# Altium PCB X-Bus_V1.0.pcbdoc
Units mil, origin at the board's own origin, x right, y up, seen from the top; angles counter-clockwise.
Board outline 1053.46 x 1407.9 mil, 2 copper layers (Top Layer, Bottom Layer); 33 components, 35 nets, 126 pads, 30 vias.
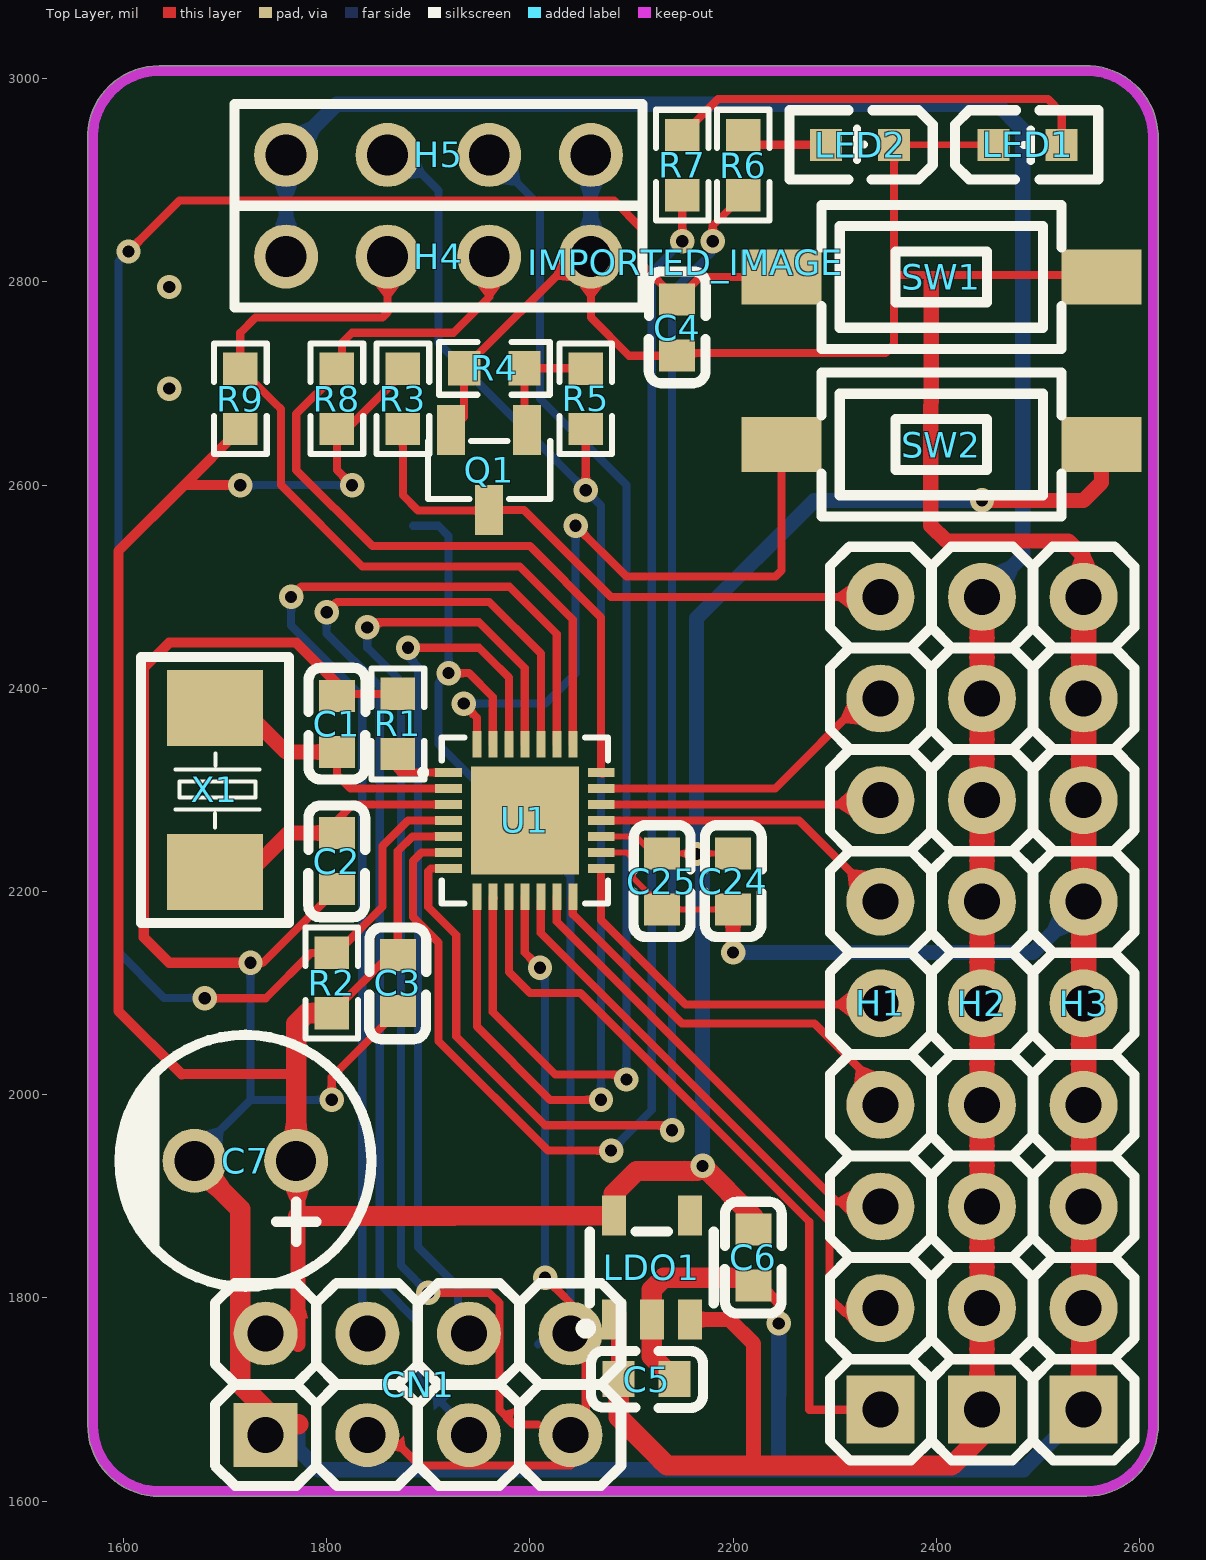
[diagram p0: Top Layer view]
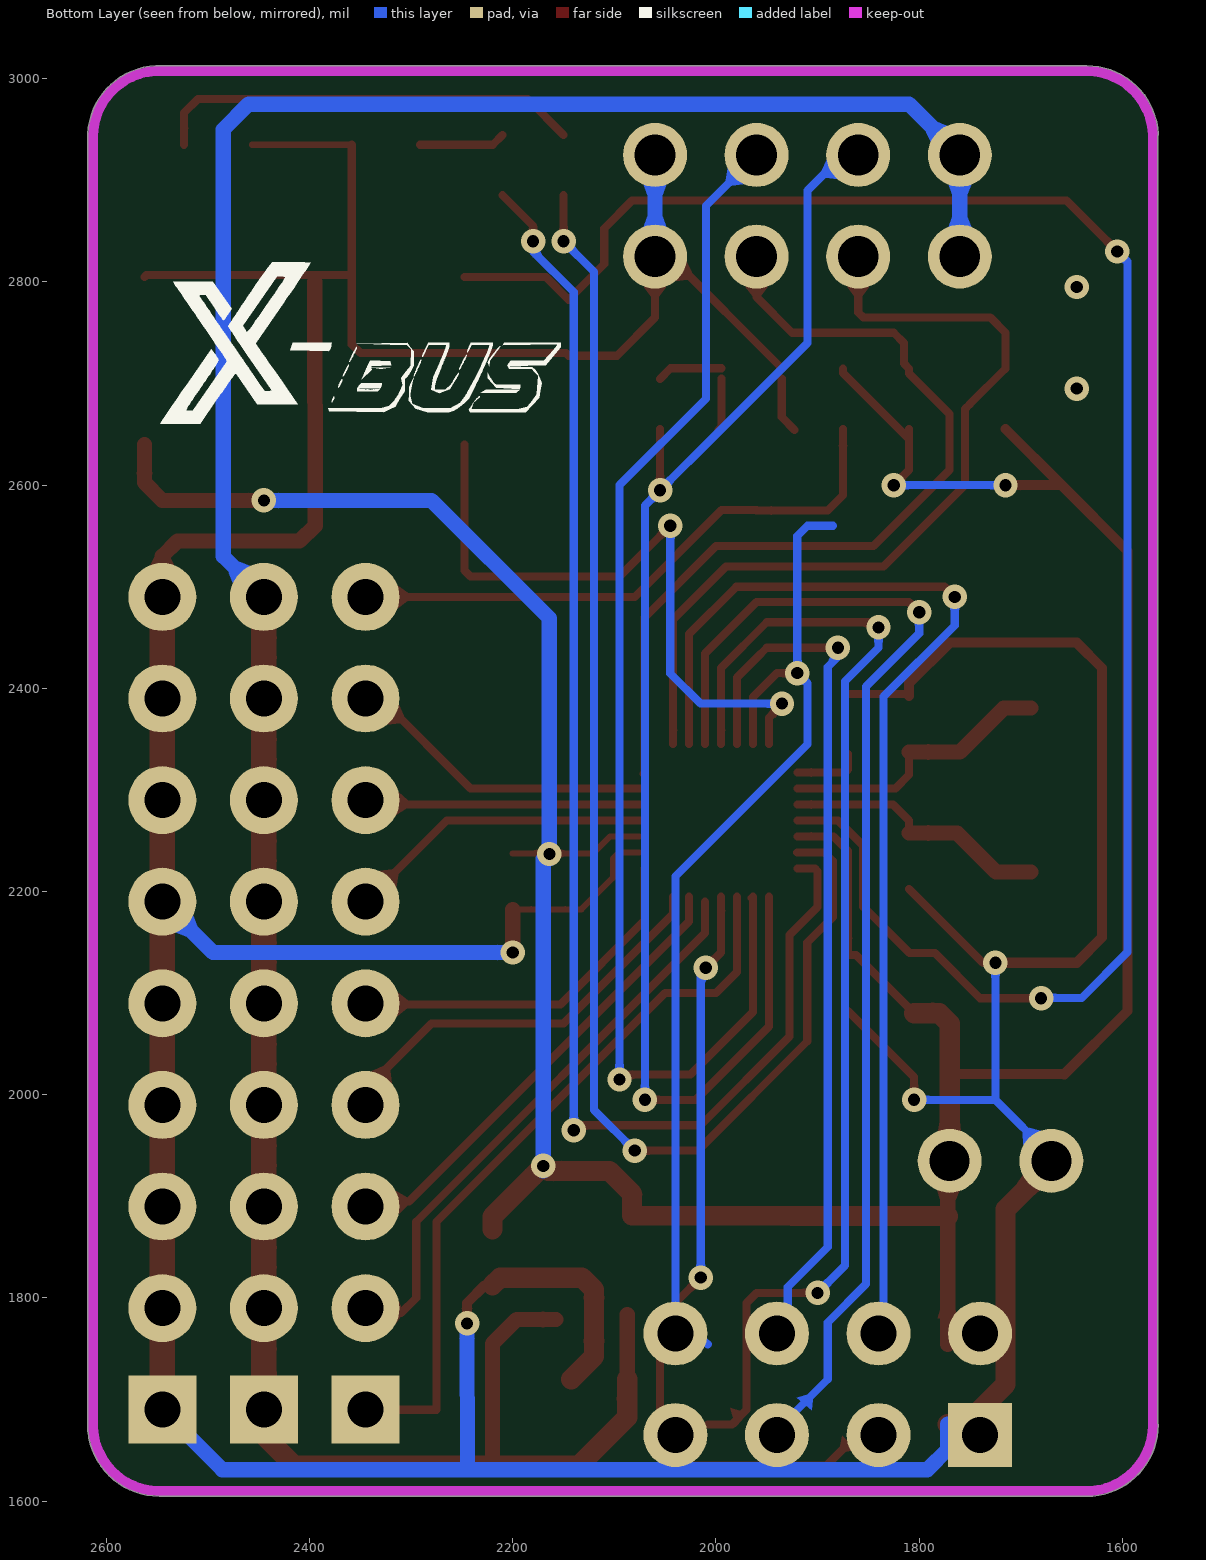
[diagram p1: Bottom Layer view, seen from below]

## Layer stack, top to bottom
Top Solder: solder mask 0.4, Solder Resist, Dk 3.5
Top Layer: signal copper 1.4
Dielectric1: dielectric 12.6, FR-4, Dk 4.8
Bottom Layer: signal copper 1.4
Bottom Solder: solder mask 0.4, Solder Resist, Dk 3.5

## Board outline
1629.95,1604.99 ccw(c1635.06,1674.69) 1631.89,1604.87 ccw(c1632.12,1609.88) 1633.21,1604.98 2547.56,1604.98 ccw(c2548.15,1609.96) 2548.15,1604.95 ccw(c2548.15,1675.16) 2618.02,1668.28 ccw(c2613.31,1670) 2618.32,1670 2618.32,2945 ccw(c2613.31,2945) 2618.24,2945.89 ccw(c2548.11,2942.64) 2551.3,3012.77 ccw(c2551.07,3007.77) 2549.96,3012.65 1635.58,3012.65 ccw(c1635,3007.7) 1635,3012.69 ccw(c1635,2942.48) 1564.87,2945.67 ccw(c1569.88,2945.44) 1564.98,2944.33 1564.98,1676.06 ccw(c1569.89,1675.01) 1564.87,1675.01 ccw(c1635.08,1675) 1629.27,1605.04 ccw(c1630,1610.01)

## Design rules (kind name [scope] priority, off if disabled: settings)
Clearance [All] p1: gap=10 ignorepadtopadclearanceinfootprint=FALSE except(0: Arc-Hole Track-Hole SMDPad-Hole THPad-Hole Via-Hole Fill-Hole Poly-Hole Region-Hole Text-Hole)
PolygonConnect [All] p1: connectstyle=Relief reliefconductorwidth=10 reliefentries=4 polygonreliefangle="90 Angle" airgapwidth=10
RoutingVias [All] p1: holewidth=28 width=50 viastyle="Through Hole" minholewidth=28 minwidth=50 maxholewidth=28 maxwidth=50
SolderMaskExpansion [All] p1: expansion=4 istentingtop=FALSE
Width [All] p1: maxlimit=10 minlimit=10 preferedwidth=10
30 further rules are at their usual default settings.

## Components (designator, comment, footprint, x,y, rotation, side; value= is the part's Value field where it differs from the comment)
C1 "22pF" C0603 1810,2365 r270 top
C2 "22pF" C0603 1810,2230 r90 top
C3 "100nF" C0603 1870,2110 r90 top
C4 "100nF" C0603 2145,2755 r270 top
C5 "1uF" C0603 2115,1720 r180 top
C6 "1uF" C0603 2220,1840 r90 top
C7 "100uF" CAP-TH_BD6.3-P2.50-D1.0-FD 1720,1935 r180 top
C24 "100nF" C0603 2200,2210 r270 top
C25 "4.7uF" C0603 2130,2210 r270 top
CN1 "A2005WV-2X4P" HDR2.54-LI-2x4P 1890,1715 r0 top
H1 "PZ254V-11-09P" HDR2.54-LI-9P 2345,2090 r90 top
H2 "PZ254V-11-09P" HDR2.54-LI-9P 2445,2090 r90 top
H3 "PZ254V-11-09P" HDR2.54-LI-9P 2545,2090 r90 top
H4 "GP26-2520WV-4P" HDR-TH_4P-P2.54-V-F-R1-C4 1910,2825 r180 top
H5 "GP26-2520WV-4P" HDR-TH_4P-P2.54-V-F-R1-C4 1910,2925 r180 top
IMPORTED_IMAGE "Comment" IMPORTED_IMAGE 2153.01,2819.37 r0 top
LDO1 "ME6211C33M5G-N" SOT-23-5_L3.0-W1.7-P0.95-LS2.8-BR 2120,1830 r270 top
LED1 "19-217/GHC-YR1S2/3T" LED0603-R-RD 2490,2935 r0 top
LED2 "19-217/GHC-YR1S2/3T" LED0603-R-RD 2325,2935 r180 top
Q1 "SS8050_C2150" SOT-23-3_L2.9-W1.3-P1.90-LS2.4-BR 1960,2615 r90 top
R1 "10K" R0603 1870,2365 r90 top
R2 "10K" R0603 1805,2110 r270 top
R3 "10K" R0603 1875,2685 r90 top
R4 "10K" R0603 1965,2715 r0 top
R5 "4.7K" R0603 2055,2685 r270 top
R6 "510R" R0603 2210,2915 r270 top
R7 "510R" R0603 2150,2915 r270 top
R8 "10K" R0603 1810,2685 r270 top
R9 "10K" R0603 1715,2685 r90 top
SW1 "TSA363G25-250B" SW-SMD_L6.5-W3.6-LS8.0 2405,2805 r180 top
SW2 "TSA363G25-250B" SW-SMD_L6.5-W3.6-LS8.0 2405,2640 r0 top
U1 "GD32E230G4U6TR" QFN-28_L4.0-W4.0-P0.40-BL-EP 1995,2270 r270 top
X1 "8MHz" OSC-SMD_L5.0-W3.2 1690,2300 r90 top

## Footprints (in the part's own frame and the unit in brackets; to place one, negate y for a bottom-side part, rotate by r counter-clockwise, add the part's x,y. Pads: shape width x height; smd on the part's side, far side on the other; paste and mask are expansions set on the pad)
C0603 [mm]
  rect 0.8x0.9 smd: 1(-0.7,0) 2(0.7,0)
  silkscreen extent -1.41,-0.71 1.39,0.72
CAP-TH_BD6.3-P2.50-D1.0-FD [mm]
  round 1.6 hole 1: 1(-1.27,0) 2(1.27,0)
  silkscreen extent -3.15,-3.15 3.17,3.15
HDR2.54-LI-2x4P [mm] "双排排针，4x2脚"
  rect 1.6x1.6 hole 0.9: 1(-3.81,-1.27)
  round 1.6 hole 0.9: 2(-3.81,1.27) 3(-1.27,-1.27) 4(-1.27,1.27) 5(1.27,-1.27) 6(1.27,1.27) 7(3.81,-1.27) 8(3.81,1.27)
  silkscreen extent -5.08,-2.54 5.08,2.53, body extent -5.08,-2.54 5.08,2.54, height 8.5
HDR2.54-LI-9P [mm] "排针，9脚"
  rect 1.7x1.7 hole 0.9: 1(-10.16,0)
  round 1.7 hole 0.9: 2(-7.62,0) 3(-5.08,0) 4(-2.54,0) 5(0,0) 6(2.54,0) 7(5.08,0) 8(7.62,0) 9(10.16,0)
  silkscreen extent -11.43,-1.27 11.42,1.26, body extent -11.43,-1.27 11.43,1.27, height 2.54
HDR-TH_4P-P2.54-V-F-R1-C4 [mm]
  round 1.6 hole 1.02: 1(-3.81,0) 2(-1.27,0) 3(1.27,0) 4(3.81,0)
  silkscreen extent -5.1,-1.27 5.1,1.27
IMPORTED_IMAGE [mil]
LED0603-R-RD [mm]
  rect 0.8x0.8 smd: 1(0.851,0) 2(-0.851,0)
  silkscreen extent -1.82,-0.86 1.77,0.86
OSC-SMD_L5.0-W3.2 [mm]
  rect 1.9x2.4 smd: 1(-2.05,0) 2(2.05,0)
  silkscreen extent -3.33,-1.85 3.33,1.85
QFN-28_L4.0-W4.0-P0.40-BL-EP [mm]
  rect 0.224x0.665 smd: 1(-1.2,-1.907) 2(-0.8,-1.907) 3(-0.4,-1.907) 4(0,-1.907) 5(0.4,-1.907) 6(0.8,-1.907) 7(1.2,-1.907) 15(1.2,1.907) 16(0.8,1.907) 17(0.4,1.907) 18(0,1.907) 19(-0.4,1.907) 20(-0.8,1.907) 21(-1.2,1.907)
  rect 0.665x0.224 smd: 8(1.907,-1.2) 9(1.907,-0.8) 10(1.907,-0.4) 11(1.907,0) 12(1.907,0.4) 13(1.907,0.8) 14(1.907,1.2) 22(-1.907,1.2) 23(-1.907,0.8) 24(-1.907,0.4) 25(-1.907,0) 26(-1.907,-0.4) 27(-1.907,-0.8) 28(-1.907,-1.2)
  rect 2.7x2.7 smd: 29(0,0)
  silkscreen extent -2.08,-2.61 2.08,2.08
R0603 [mil]
  rect 31.75x34.02 smd: 1(-29.66,0) 2(29.66,0)
  silkscreen extent -55,-26 55,26
SOT-23-3_L2.9-W1.3-P1.90-LS2.4-BR [mm]
  rect 1.25x0.7 smd: 1(1,-0.95) 2(1,0.95) 3(-1,0)
  silkscreen extent -0.73,-1.53 0.73,1.53
SOT-23-5_L3.0-W1.7-P0.95-LS2.8-BR [mm]
  rect 1x0.6 smd: 1(1.3,-0.95) 2(1.3,0) 3(1.3,0.95) 4(-1.3,0.95) 5(-1.3,-0.95)
  silkscreen extent -0.9,-1.78 1.65,1.55
SW-SMD_L6.5-W3.6-LS8.0 [mm]
  rect 2x1.38 smd: 1(-4,0) 2(4,0)
  silkscreen extent -3,-1.8 3,1.8

## Via types
v1: diameter 24, hole 12, Top Layer to Bottom Layer, 30 vias

## Nets (pads, with @x,y where several pads share a name; then routed paths per layer and width w, separated by ;. In a path a pad name is that pad's centre, name@x,y a point inside that pad or via, vN(x,y) a via of type N, cw(c..) or ccw(c..) an arc to the next point about the centre after c; other vN are vias at no path point)
+5V: C5.2 H2.1 H2.2 H2.3 H2.4 H2.5 H2.6 H2.7 H2.8 H2.9 H4.4 H5.4 LDO1.1 LDO1.3 | length 3390.7
  Top Layer w15: LDO1.1@2087.4,1783.82 C5.2 2087.4,1682.52 2135,1635.02 2415,1635.02 ; LDO1.3 2196.2,1778.82 2220,1755.02 2220,1635.02 ; 2385,1635.02 2415,1635.02 ; 2415,1635.02 H2.1@2445,1665.02 ; 2415,1635.02 H2.1@2445,1665.02 ; H2.1@2445,1665.02 H2.1 H2.1@2445,1665.02
  Top Layer w20: C5.2 2087.4,1682.52 2128.6,1641.41 ; 2128.57,1641.43 2134.99,1635.02 2385,1635.02 2415,1635.02 2445,1665.02 H2.1
  Top Layer w25: H2.1 H2.9
  Bottom Layer w15: H4.4 H5.4 1810,2975.01 2460,2975.01 2485,2950.01 2485,2530.01 H2.9
GND: C1.1 C2.1 C3.1 C4.2 C5.1 C6.1 C7.2 C24.2 C25.2 CN1.1 H3.1 H3.2 H3.3 H3.4 H3.5 H3.6 H3.7 H3.8 H3.9 H4.1 H5.1 LDO1.2 LED1.2 LED2.2 Q1.2 R1.2 R4.1 SW1.1 U1.16 | length 5755.8
  Top Layer w6: U1.16@2075.1,2238.51 2095.3,2238.51 2101.5,2232.32 2101.5,2213.51 2132.6,2182.41 2135,2182.41 C24.2 ; LED2.2 LED1.2
  Top Layer w8: v1(1725,2129.99) 1737.6,2130.01 C2.1 ; v1(1805,1994.99) 1805,2017.41 C3.1 ; C1.1@1810,2392.51 1812.1,2394.61 R1.2@1870,2394.61 ; Q1.2 1935.3,2667.11 R4.1@1935.3,2705.01 ; R4.1 2045.3,2825.01 H4.1 2060,2765.01 2097.6,2727.41 C4.2 2147.6,2730.01 2350,2730.01 2358.5,2738.51 LED2.2 ; 2358.5,2806.72 2560.8,2806.72 SW1.1
  Top Layer w10: v1(1725,2129.99) 1645,2130 1620,2155 1620,2420 1645,2445 1770,2445 1810,2405 C1.1 ; C6.1 2227.6,1812.41 2245,1795.02 v1(2245,1774.99)
  Top Layer w15: v1(2200,2139.99) C24.2 ; 2395,2800 2394.5,2560.01 2410,2545.01 2530,2545.01 2545,2530.01 H3.9
  Top Layer w20: C7.2 1670,1932.32 1715,1887.32 1715,1715.02 1754.4,1675.62 1771.9,1675.62 ; C5.1 2120,1742.52 LDO1.2 2120,1808.21 2131.8,1820.02 2212.4,1820.02 C6.1
  Top Layer w25: H3.1 H3.9
  Bottom Layer w8: C7.2 1670,1940.02 1725,1995.02 ; v1(1725,2129.99) 1725,1995.02 ; v1(1805,1994.99) 1729.99,1994.99 1725,1995.02
  Bottom Layer w15: 1771.9,1675.62 1771.9,1651.12 1792,1631.02 2486,1631.02 H3.1 ; H4.1 H5.1 ; v1(2200,2139.99) 2495,2140 H3.6 ; 2244.6,1631.02 v1(2245,1774.99)
  other v1: 1645,2694.99 1645,2794.99
LDO1_4: LDO1.4
LED1_1: LED1.1 R7.1 | length 425.3
  Top Layer w8: R7.1@2150,2944.61 2185.3,2980.01 2510,2980.01 2523.5,2966.51 LED1.1
LED2_1: LED2.1 R6.1 | length 85.4
  Top Layer w8: R6.1@2210,2944.61 2219.7,2935.01 LED2.1
LED_0: R6.2 U1.7 | length 1395
  Top Layer w8: U1.7@1919.9,2222.72 1902.7,2222.72 1900,2220.01 1900,2184.91 1927.5,2157.41 1927.5,2057.51 2015,1970.02 2135,1970.02 v1(2140,1964.99) ; v1(2180,2839.99) 2180,2855.32 R6.2
  Bottom Layer w8: v1(2140,1964.99) 2140,2790 2180,2830 v1(2180,2839.99)
LED_1: R7.2 U1.6 | length 1410.3
  Top Layer w8: 1910,2150.01 1910.2,2149.82 ; U1.6@1920,2238.32 1893.3,2238.32 1885,2230.22 1885,2175.01 1910.2,2149.82 ; v1(2080,1944.99) 2017.81,1945 1910.2,2052.61 1910.2,2149.82 ; v1(2150,2839.99) R7.2
  Bottom Layer w8: v1(2080,1944.99) 2120,1985 2120,2810 v1(2150,2839.99)
NRF_CE: CN1.3 U1.11 | length 800.1
  Top Layer w8: CN1.3@1850.6,1675.62 1891.3,1635.02 2040,1635.02 2055,1650.02 2055,1779.99 v1(2015,1819.99) ; U1.11 1995,2140.01 v1(2010,2124.99)
  Bottom Layer w8: v1(2010,2124.99) 2015,2124.99 v1(2015,1819.99)
NRF_IRQ: CN1.8 U1.27 | length 1005.7
  Top Layer w8: v1(1920,2414.99) 1940,2415.01 1963.5,2391.51 U1.27
  Bottom Layer w8: 1884.9,2560.01 1910,2560.01 1920,2550.01 v1(1920,2414.99) 1910,2405.01 1910,2345.01 2040,2215.01 2040,1786.21 2008.1,1754.41
Q1_1: Q1.1 R4.2 R5.1 | length 116.4
  Top Layer w8: R4.2@1994.7,2705.01 1994.7,2657.11 Q1.1 ; R4.2 2044.7,2715.01 R5.1@2055,2704.61
Q1_3: H1.9 Q1.3 R3.1 | length 577
  Top Layer w8: R3.1 1875,2590.01 1890,2575.01 Q1.3@1960,2575.01 ; Q1.3 1994.4,2575.61 2080,2490.01 H1.9
S$3194: 
SPI0_MISO: CN1.7 U1.25 | length 1153.7
  Top Layer w8: v1(1840,2459.99) 1845,2465.01 1950,2465.01 1995,2420.01 U1.25 ; v1(1900,1804.99) 1960,1805.02 1970,1795.02 1970,1690.02 1984.4,1675.62 2008.1,1675.62
  Bottom Layer w8: v1(1840,2459.99) 1840,2440 1873,2407 1873,1862 1873,1831.99 v1(1900,1804.99)
SPI0_MOSI: CN1.6 U1.26 | length 883.1
  Top Layer w8: v1(1880,2439.99) 1950,2440.01 1960,2430.01 1979.3,2410.72 U1.26
  Bottom Layer w8: v1(1880,2439.99) 1880,2431.11 1890,2421.11 1890,1850.02 1929.4,1810.62 CN1.6@1929.4,1754.41
SPI0_NSS: CN1.4 U1.23 | length 1242.8
  Top Layer w8: v1(1765,2489.99) 1775,2500.01 1980,2500.01 2026.5,2453.51 U1.23
  Bottom Layer w8: v1(1765,2489.99) 1765,2462.01 1835,2392.01 1835,1921.71 ; 1835,1916.25 1835,1954.95 ; 1835,1952.32 1835,1754.41 CN1.4@1850.6,1754.41
SPI0_SCLK: CN1.5 U1.24 | length 1178.2
  Top Layer w8: v1(1800,2474.99) 1810,2485.01 1960,2485.01 2011,2434.22 U1.24@2011,2345.11
  Bottom Layer w8: v1(1800,2474.99) 1800,2454.01 1852.3,2401.72 1852.3,1813.71 1890,1776.02 1890,1720.02 1929.4,1680.62 CN1.5@1929.4,1675.62
SWCLK: H4.3 R9.2 U1.22 | length 839.7
  Top Layer w8: H4.3 1860,2770.01 1855,2765.01 1730,2765.01 1715,2750.01 1715,2714.61 1715.3,2714.61 1750.3,2679.61 1755,2675.01 1755,2600.01 1835,2520.01 1990,2520.01 2042.2,2467.82 U1.22
SWDIO: H4.2 R8.1 U1.21 | length 862
  Top Layer w8: H4.2 1960,2785.01 1925,2750.01 1825,2750.01 1815,2740.01 1815,2719.61 1810,2714.61 1810,2710.01 1770,2670.01 1770,2615.01 1845,2540.01 2000,2540.01 2070.1,2469.91 U1.21 ; U1.21 U1.21@2071.36,2315.97
TIMER0_CH0: H1.6 U1.18 | length 308
  Top Layer w8: U1.18 2265,2270.01 H1.6
TIMER0_CH1: H1.7 U1.19 | length 276.7
  Top Layer w8: U1.19 2340.8,2285.72 H1.7
TIMER0_CH2: H1.8 U1.20 | length 311.6
  Top Layer w8: U1.20 2241.5,2301.51 2330,2390.01 H1.8
TIMER2_CH0: H1.2 U1.12 | length 563.9
  Top Layer w8: U1.12@2010.7,2189.91 2010.7,2159.22 2295,1875.02 2295,1800.02 2310,1785.02 H1.2@2345,1785.02
TIMER2_CH1: H1.3 U1.13 | length 459.1
  Top Layer w8: U1.13 2026.5,2170.51 2302,1895.02 2340,1895.02 H1.3
TIMER2_CH2: H1.4 U1.14 | length 406.5
  Top Layer w8: U1.14 2042.2,2177.72 2149.9,2070.01 2280,2070.01 2345,2005.02 H1.4
TIMER2_CH3: H1.5 U1.15 | length 360.5
  Top Layer w8: U1.15@2070.1,2222.72 2070.1,2171.91 2153.1,2088.91 2343.9,2088.91 H1.5
TIMER13_CH0_PPM: H1.1 U1.10 | length 726.7
  Top Layer w8: U1.10 1979.3,2120.72 2000,2100.01 2050,2100.01 2275,1875.02 2275,1690.02 H1.1
U1_1: R1.1 U1.1 | length 66.4
  Top Layer w8: R1.1 1870,2320.01 1872.8,2317.22 U1.1
U1_2: C1.2 U1.2 X1.2 | length 275.8
  Top Layer w8: C1.2 1810,2315.01 1823.5,2301.51 U1.2
  Top Layer w15: X1.2 1716.7,2380.72 1760,2337.41 C1.2
U1_3: C2.2 U1.3 X1.1 | length 264.7
  Top Layer w8: C2.2@1810,2257.51 1810,2270.01 1825.7,2285.72 U1.3
  Top Layer w15: X1.1 1724.3,2219.32 1762.6,2257.51 C2.2@1810,2257.51
U1_4: C4.1 R2.1 SW1.2 U1.4 | length 1878.6
  Top Layer w8: v1(1605,2829.99) 1655,2880.01 2082.7,2880.01 2110,2852.72 2110,2817.51 2145,2782.51 2167.4,2805.01 SW1.2 ; v1(1680,2094.99) 1740,2095.01 1784.6,2139.61 1805,2139.61 1809.7,2139.61 1855,2185.01 1855,2245.01 1880,2270.01 U1.4
  Bottom Layer w8: v1(1605,2829.99) 1595,2820 1595,2140.32 1640.01,2095.32 v1@1680,2095.32
U1_28: SW2.1 U1.28 | length 662.7
  Top Layer w8: v1(1935,2384.99) 1935,2383.82 1947.8,2371.01 U1.28 ; v1(2045,2559.99) 2095,2510.01 2241.7,2510.01 2247.5,2515.82 SW2.1
  Bottom Layer w8: v1(1935,2384.99) 2015.4,2385.01 2045,2414.61 v1(2045,2559.99)
U1_29: U1.29
USART0_RX: H5.2 U1.9 | length 1251.5
  Top Layer w8: U1.9 1964.8,2193.61 1963.5,2192.32 1963.5,2081.51 2025,2020.02 2090,2020.02 v1(2095,2014.99)
  Bottom Layer w8: H5.2 2010,2875.01 2010,2745.01 ; 2010,2757.11 2010,2685.01 2095,2600.01 2095,2570.72 2095,2565 v1(2095,2014.99)
USART0_TX: H5.3 R5.2 U1.8 | length 1363
  Top Layer w8: U1.8 1947.8,2067.22 2020,1995.02 v1(2070,1994.99) ; v1(2055,2594.99) R5.2
  Bottom Layer w8: H5.3@1866.4,2933.61 1910,2890.01 1910,2740.01 2000,2650.01 v1(2055,2594.99) 2070,2579.99 v1(2070,1994.99)
VCC: C3.2 C6.2 C7.1 C24.1 C25.1 CN1.2 LDO1.5 R2.2 R3.2 R8.2 R9.1 SW2.2 U1.5 U1.17 | length 3509.3
  Top Layer w6: U1.17@2075.1,2254.22 2104.3,2254.22 2120.9,2237.51 C24.1@2200,2237.51
  Top Layer w8: R2.2 1862.2,2137.51 1870,2137.51 1870,2240.01 1884.3,2254.22 U1.5@1919.9,2254.22 ; R8.2@1810,2645.32 1875,2710.32 R3.2@1875,2714.61 ; R8.2 1810,2615.01 v1(1825,2599.99)
  Top Layer w10: v1(1715,2599.99) 1659.8,2600.01 ; 1770,2020.52 1657.3,2020.12 1595,2082.41 1595,2535.22 1659.8,2600.01 ; 1659.8,2600.01 R9.1 1683,2623.32 1659.8,2600.01
  Top Layer w15: C7.1 1771.89,1933.11 1771.89,1754.37 ; v1(2445,2584.99) 2545,2585.01 2562.5,2602.51 SW2.2
  Top Layer w20: C7.1 1770,2070.01 1780.3,2080.32 R2.2 ; 1771.9,1880.32 LDO1.5 2082.6,1902.62 2105,1925.02 2165,1925.02 v1(2170,1929.99) 2220,1880.02 C6.2@2220,1867.52
  Bottom Layer w8: v1(1715,2599.99) v1(1825,2599.99)
  Bottom Layer w15: v1@2164,2232.01 2170,2232.01 v1@2170,1925.02 ; v1(2164,2236.99) 2164,2469 2280,2585 v1(2445,2584.99)

## Keep-outs
Keep-Out Layer:
  lines w10: 1569.89,1675.01 ccw(c1635.08,1675) 1632.12,1609.88 ; 1569.88,2945.44 cw(c1635,2942.48) 1635,3007.67 2552,3007.64 ; 1570,1675 1570,2946.32 ; 1630,1610 2550,1610 ; 2548.15,1609.97 ccw(c2548.15,1675.16) 2613.27,1672.2 ; 2551.07,3007.76 cw(c2548.11,2942.64) 2613.3,2942.64 ; 2613.31,1670 2613.31,2945

## Other copper
Top Layer:
  region net SPI0_MISO: 1999,2358.19 1991,2358.19 1991,2359.39 1999,2359.39
  region net SWCLK: 2046.2,2358.19 2038.2,2358.19 2038.2,2359.39 2046.2,2359.39
  region net NRF_CE: 1991,2181.81 1999,2181.81 1999,2180.61 1991,2180.61
  region net VCC: 1906.81,2250.25 1906.81,2258.25 1905.61,2258.25 1905.61,2250.25
  region net U1_3: 1906.81,2281.72 1906.81,2289.72 1905.61,2289.72 1905.61,2281.72
  region net U1_1: 1906.81,2313.21 1906.81,2321.21 1905.61,2321.21 1905.61,2313.21
  region net VCC: 2570,2612.83 2555,2612.83 2555,2610.58 2570,2610.58
  region net USART0_TX: 2059,2639.47 2051,2639.47 2051,2638.27 2059,2638.27
  region net Q1_1: 2010.53,2719 2010.53,2711 2011.73,2711 2011.73,2719
  region net Q1_3: 1871,2639.47 1879,2639.47 1879,2638.27 1871,2638.27
  region net VCC: 1787.99,2070.34 1787.99,2090.34 1784.99,2090.34 1784.99,2070.34
  region net Q1_3: 1946.22,2571.01 1946.22,2579.01 1945.02,2579.01 1945.02,2571.01
  region net GND: 2362.5,2919.25 2354.5,2919.25 2354.5,2918.05 2362.5,2918.05
  region net LED1_1: 2519.5,2950.75 2527.5,2950.75 2527.5,2951.95 2519.5,2951.95
  region net GND: 2110,1798.5 2130,1798.5 2130,1801.5 2110,1801.5
  region net GND: 2130,1759.13 2110,1759.13 2110,1756.13 2130,1756.13
  region net +5V: 2169.21,1786.32 2169.21,1771.32 2171.46,1771.32 2171.46,1786.32
  region net VCC: 2072.6,1900.87 2092.6,1900.87 2092.6,1902.61 2072.6,1902.61
  region net GND: 2532.5,1723.47 2557.5,1723.47 2557.5,1727.22 2532.5,1727.22
  region net +5V: 2432.5,1723.47 2457.5,1723.47 2457.5,1727.22 2432.5,1727.22
  region net GND: 2147.72,2185.43 2147.72,2179.43 2148.62,2179.43 2148.62,2185.43
  region net GND: 2182.28,2179.43 2182.28,2185.43 2181.38,2185.43 2181.38,2179.43
  region net GND: 2207.5,2166.69 2192.5,2166.69 2192.5,2164.44 2207.5,2164.44
  region net +5V: 2079.9,1737.72 2094.9,1737.72 2094.9,1739.97 2079.9,1739.97
  region net +5V: 2097.44,1702.28 2077.44,1702.28 2077.44,1699.28 2097.44,1699.28
  region net +5V: 2094.94,1702.28 2079.94,1702.28 2079.94,1700.03 2094.94,1700.03
  region net GND: 2162.72,2734 2162.72,2726 2163.92,2726 2163.92,2734
  region net VCC: 1866,2153.31 1874,2153.31 1874,2154.51 1866,2154.51
  region net U1_3: 1792.28,2250.06 1792.28,2265.06 1790.03,2265.06 1790.03,2250.06
  region net U1_2: 1792.28,2329.93 1792.28,2344.93 1790.03,2344.93 1790.03,2329.93
  region net GND: 2249.2,1786.24 2240.8,1786.24 2240,1789.84 2250,1789.84
  region net GND: 1736.24,2125.8 1736.24,2134.2 1737.56,2134 1737.56,2126
  region net U1_4: 1615.91,2834.99 1609.97,2840.92 1612.66,2843.33 1618.32,2837.68
  region net U1_4: 1691.24,2090.8 1691.24,2099.2 1694.84,2099 1694.84,2091
  region net GND: 2204.2,2151.24 2195.8,2151.24 2192.5,2154.84 2207.5,2154.84
  region net GND: 1809.2,2006.24 1800.8,2006.24 1801,2009.84 1809,2009.84
  region net VCC: 1703.76,2595.8 1703.76,2604.2 1700.16,2605 1700.16,2595
  region net VCC: 1820.02,2610.92 1814.08,2604.98 1811.68,2607.67 1817.33,2613.32
  region net VCC: 2456.25,2580.81 2456.24,2589.21 2459.83,2592.51 2459.85,2577.51
  region net VCC: 2175.39,2233.22 2175.07,2241.62 2178.72,2240.56 2178.94,2234.56
  region net VCC: 2152.92,2241.62 2152.61,2233.22 2149.06,2234.56 2149.28,2240.56
  region net VCC: 2160.82,1922.27 2158,1930.18 2152.45,1935.01 2159.59,1915.01
  region net VCC: 2180.92,1925.02 2174.98,1919.08 2173.42,1912.43 2187.56,1926.57
  region net SPI0_MISO: 1911.24,1800.8 1911.24,1809.2 1914.84,1809 1914.84,1801
  region net NRF_CE: 2025.92,1815.02 2019.98,1809.08 2022.66,1806.68 2028.32,1812.33
  region net U1_28: 2055.92,2555.03 2049.99,2549.09 2052.68,2546.68 2058.33,2552.34
  region net USART0_TX: 2059.2,2606.24 2050.8,2606.24 2051,2609.84 2059,2609.84
  region net NRF_IRQ: 1931.24,2410.8 1931.24,2419.2 1934.84,2419 1934.84,2411
  region net SPI0_MISO: 1852,2459.85 1849.16,2467.75 1852.53,2469.01 1855.4,2461.01
  region net SPI0_MOSI: 1891.24,2435.8 1891.24,2444.2 1894.84,2444 1894.84,2436
  region net SPI0_SCLK: 1810.92,2479.98 1804.98,2485.92 1807.17,2487.82 1812.83,2482.17
  region net SPI0_NSS: 1775.91,2494.99 1769.97,2500.92 1772.17,2502.84 1777.83,2497.19
  region net U1_28: 1945.62,2379.41 1939.35,2373.82 1941.9,2371.26 1947.87,2376.6
  region net LED_1: 2154.2,2851.24 2145.8,2851.24 2146,2854.84 2154,2854.84
  region net LED_0: 2184.2,2851.24 2175.8,2851.24 2176,2854.84 2184,2854.84
  region net USART0_RX: 2085.84,2022.75 2083,2014.85 2079.6,2016.01 2082.47,2024.01
  region net USART0_TX: 2058.76,1990.8 2058.76,1999.2 2055.16,1999 2055.16,1991
  region net NRF_CE: 2005.02,2135.92 1999.08,2129.98 1996.68,2132.66 2002.33,2138.32
  region net LED_0: 2130.83,1972.74 2128,1964.83 2124.6,1966 2127.46,1974
  region net LED_1: 2068.76,1940.8 2068.76,1949.2 2065.16,1949 2065.16,1941
  region net SWCLK: 1871.02,2795.5 1848.98,2795.5 1856,2786.05 1864,2786.05
  region net SWDIO: 1971.02,2795.5 1948.98,2795.5 1956,2786.05 1964,2786.05
  region net GND: 2071.02,2795.5 2048.98,2795.5 2056,2786.05 2064,2786.05
  region net GND: 2039.78,2800.85 2028.9,2820.03 2024.07,2809.39 2028.17,2802.17
  region net GND: 2556.71,2458.65 2533.29,2458.65 2532.5,2448.61 2557.5,2448.61
  region net GND: 2556.71,2521.35 2533.29,2521.35 2537.5,2530.01 2552.5,2530.01
  region net GND: 2556.71,2358.65 2533.29,2358.65 2532.5,2348.61 2557.5,2348.61
  region net GND: 2556.71,2421.35 2533.29,2421.35 2532.5,2431.39 2557.5,2431.39
  region net GND: 2556.71,2258.65 2533.29,2258.65 2532.5,2248.61 2557.5,2248.61
  region net GND: 2556.71,2321.35 2533.29,2321.35 2532.5,2331.39 2557.5,2331.39
  region net GND: 2556.71,2158.65 2533.29,2158.65 2532.5,2148.61 2557.5,2148.61
  region net GND: 2556.71,2221.35 2533.29,2221.35 2532.5,2231.39 2557.5,2231.39
  region net GND: 2556.71,2058.65 2533.29,2058.65 2532.5,2048.61 2557.5,2048.61
  region net GND: 2556.71,2121.35 2533.29,2121.35 2532.5,2131.39 2557.5,2131.39
  region net GND: 2556.71,1958.65 2533.29,1958.65 2532.5,1948.61 2557.5,1948.61
  region net GND: 2556.71,2021.35 2533.29,2021.35 2532.5,2031.39 2557.5,2031.39
  region net GND: 2556.71,1858.65 2533.29,1858.65 2532.5,1848.61 2557.5,1848.61
  region net GND: 2556.71,1921.35 2533.29,1921.35 2532.5,1931.39 2557.5,1931.39
  region net GND: 2556.71,1758.65 2533.29,1758.65 2532.5,1748.61 2557.5,1748.61
  region net GND: 2556.71,1821.35 2533.29,1821.35 2532.5,1831.39 2557.5,1831.39
  region net +5V: 2456.71,2458.65 2433.29,2458.65 2432.5,2448.61 2457.5,2448.61
  region net +5V: 2456.71,2358.65 2433.29,2358.65 2432.5,2348.61 2457.5,2348.61
  region net +5V: 2456.71,2421.35 2433.29,2421.35 2432.5,2431.39 2457.5,2431.39
  region net +5V: 2456.71,2258.65 2433.29,2258.65 2432.5,2248.61 2457.5,2248.61
  region net +5V: 2456.71,2321.35 2433.29,2321.35 2432.5,2331.39 2457.5,2331.39
  region net +5V: 2456.71,2158.65 2433.29,2158.65 2432.5,2148.61 2457.5,2148.61
  region net +5V: 2456.71,2221.35 2433.29,2221.35 2432.5,2231.39 2457.5,2231.39
  region net +5V: 2456.71,2058.65 2433.29,2058.65 2432.5,2048.61 2457.5,2048.61
  region net +5V: 2456.71,2121.35 2433.29,2121.35 2432.5,2131.39 2457.5,2131.39
  region net +5V: 2456.71,1958.65 2433.29,1958.65 2432.5,1948.61 2457.5,1948.61
  region net +5V: 2456.71,2021.35 2433.29,2021.35 2432.5,2031.39 2457.5,2031.39
  region net +5V: 2456.71,1858.65 2433.29,1858.65 2432.5,1848.61 2457.5,1848.61
  region net +5V: 2456.71,1921.35 2433.29,1921.35 2432.5,1931.39 2457.5,1931.39
  region net +5V: 2456.71,1758.65 2433.29,1758.65 2432.5,1748.61 2457.5,1748.61
  region net +5V: 2456.71,1821.35 2433.29,1821.35 2432.5,1831.39 2457.5,1831.39
  region net Q1_3: 2313.66,2501.72 2313.65,2478.3 2303.61,2486.01 2303.61,2494.01
  region net TIMER0_CH2: 2323.77,2364.13 2312.01,2384.39 2307.13,2372.8 2311.28,2365.64
  region net TIMER0_CH1: 2315.02,2275.13 2312.61,2298.43 2303.42,2289.75 2304.24,2281.75
  region net TIMER0_CH0: 2331.12,2220.45 2314.56,2203.89 2312.91,2216.44 2318.57,2222.1
  region net TIMER2_CH3: 2313.96,2077.49 2313.36,2100.91 2303.52,2092.94 2303.73,2084.94
  region net TIMER2_CH2: 2339.39,2022.99 2319.13,2011.23 2320.64,2023.72 2327.8,2027.87
  region net TIMER2_CH1: 2315.3,1905.42 2312.46,1882.17 2303.43,1891.01 2304.41,1899.01
  region net TIMER2_CH0: 2315.62,1773.98 2312.31,1797.18 2309.43,1789.01 2310.57,1781.01
  region net SPI0_MISO: 1985.81,1691.82 1980.66,1673.23 1974.04,1680.31 1976.49,1689.16
  region net NRF_CE: 1875.71,1664.2 1862.07,1650.56 1871.91,1648.71 1877.57,1654.37
  region net VCC: 1762.24,1780.19 1781.54,1780.19 1779.39,1788.45 1764.39,1788.45
  region net GND: 1698,1920.57 1681.68,1905.75 1688.78,1899.43 1703.6,1912.9
  region net VCC: 1760.42,1905 1782.44,1906.07 1779.39,1896.46 1764.39,1895.73
  region net VCC: 1781.02,1964.5 1758.98,1964.5 1760,1973.95 1780,1973.95
Bottom Layer:
  region net GND: 2249.17,1763.75 2240.77,1763.77 2237.46,1760.18 2252.46,1760.14
  region net GND: 1729.2,2118.76 1720.8,2118.76 1721,2115.16 1729,2115.16
  region net U1_4: 1600.02,2819.08 1594.08,2825.02 1592.17,2822.83 1597.83,2817.17
  region net U1_4: 1668.85,2099.44 1668.67,2091.04 1665.08,2091.32 1665.25,2099.32
  region net GND: 2211.24,2135.8 2211.24,2144.2 2214.84,2147.5 2214.84,2132.5
  region net GND: 1793.76,1990.8 1793.76,1999.2 1790.16,1999 1790.16,1991
  region net VCC: 1726.24,2595.8 1726.24,2604.2 1729.84,2604 1729.84,2596
  region net VCC: 1813.76,2595.8 1813.76,2604.2 1810.16,2604 1810.16,2596
  region net VCC: 2433.76,2580.8 2433.76,2589.2 2430.16,2592.5 2430.16,2577.5
  region net VCC: 2168.2,2248.24 2159.8,2248.24 2156.5,2251.84 2171.5,2251.84
  region net VCC: 2172.39,2228.42 2164.7,2225.02 2162.5,2220.11 2177.5,2226.74
  region net VCC: 2174.2,1941.24 2165.8,1941.24 2162.5,1944.84 2177.5,1944.84
  region net SPI0_MISO: 1895.02,1815.92 1889.08,1809.98 1886.68,1812.66 1892.33,1818.32
  region net NRF_CE: 2019.2,1831.24 2010.8,1831.24 2011,1834.84 2019,1834.84
  region net U1_28: 2049.2,2548.76 2040.8,2548.76 2041,2545.16 2049,2545.16
  region net USART0_TX: 2065.92,2590.02 2059.98,2584.08 2062.66,2581.68 2068.32,2587.33
  region net USART0_TX: 2050.03,2605.92 2044.09,2599.99 2041.68,2602.68 2047.34,2608.33
  region net NRF_IRQ: 1924.2,2426.24 1915.8,2426.24 1916,2429.84 1924,2429.84
  region net NRF_IRQ: 1915.01,2404.09 1909.08,2410.03 1907.17,2407.85 1912.83,2402.18
  region net SPI0_MISO: 1844.2,2448.76 1835.8,2448.76 1836,2445.16 1844,2445.16
  region net SPI0_MOSI: 1887.78,2430.87 1879.89,2428 1880.92,2424.54 1889.22,2427.56
  region net SPI0_SCLK: 1804.2,2463.76 1795.8,2463.76 1796,2460.16 1804,2460.16
  region net SPI0_NSS: 1769.2,2478.76 1760.8,2478.76 1761,2475.16 1769,2475.16
  region net U1_28: 1946.25,2380.81 1946.24,2389.21 1949.84,2389.01 1949.84,2381.01
  region net LED_1: 2145.02,2829.08 2139.08,2835.02 2136.68,2832.33 2142.33,2826.68
  region net LED_0: 2180.82,2828.03 2172.77,2830.42 2171.41,2827.07 2180.13,2824.48
  region net USART0_RX: 2099.2,2026.24 2090.8,2026.24 2091,2029.84 2099,2029.84
  region net USART0_TX: 2074.2,2006.24 2065.8,2006.24 2066,2009.84 2074,2009.84
  region net NRF_CE: 2017.74,2115.83 2009.83,2113 2011,2109.6 2019,2112.46
  region net LED_0: 2144.2,1976.24 2135.8,1976.24 2136,1979.84 2144,1979.84
  region net LED_1: 2090.92,1949.98 2084.98,1955.92 2087.67,1958.32 2093.32,1952.67
  region net +5V: 1788.66,2938.07 1773.07,2953.66 1782.24,2957.85 1792.85,2947.24
  region net +5V: 1771.02,2895.5 1748.98,2895.5 1752.5,2886.05 1767.5,2886.05
  region net USART0_TX: 1891.13,2920.24 1880.38,2900.99 1891.98,2902.38 1896.04,2909.64
  region net USART0_RX: 1988.66,2911.93 1973.07,2896.34 1984.72,2894.63 1990.37,2900.28
  region net GND: 2071.02,2895.5 2048.98,2895.5 2052.5,2886.05 2067.5,2886.05
  region net +5V: 1771.02,2854.5 1748.98,2854.5 1752.5,2863.95 1767.5,2863.95
  region net GND: 2071.02,2854.5 2048.98,2854.5 2052.5,2863.95 2067.5,2863.95
  region net GND: 2531.12,2159.55 2514.55,2176.12 2510.43,2166.04 2521.04,2155.43
  region net +5V: 2475.45,2503.88 2458.88,2520.45 2468.96,2524.57 2479.57,2513.96
  region net NRF_IRQ: 2033.19,1765.8 2019.54,1779.45 2029.38,1781.3 2035.04,1775.64
  region net SPI0_MOSI: 1939.04,1780.18 1919.75,1780.19 1925.4,1788.46 1933.4,1788.45
  region net SPI0_SCLK: 1920.6,1701.76 1905.62,1689.6 1904.78,1699.57 1911.02,1704.63
  region net SPI0_NSS: 1847.36,1781.73 1830.22,1772.89 1831,1782.59 1839,1786.72
  region net GND: 1697.35,1950.61 1680.41,1964.73 1691.84,1967.5 1698.02,1962.36